# Altium PCB Tunng_PCB2.PcbDoc
Units mm, origin at the board's own origin, x right, y up, seen from the top; angles counter-clockwise.
Board outline 95.38 x 64.77 mm, 2 copper layers (Top Layer, Bottom Layer); 34 components, 13 nets, 174 pads, 0 vias.
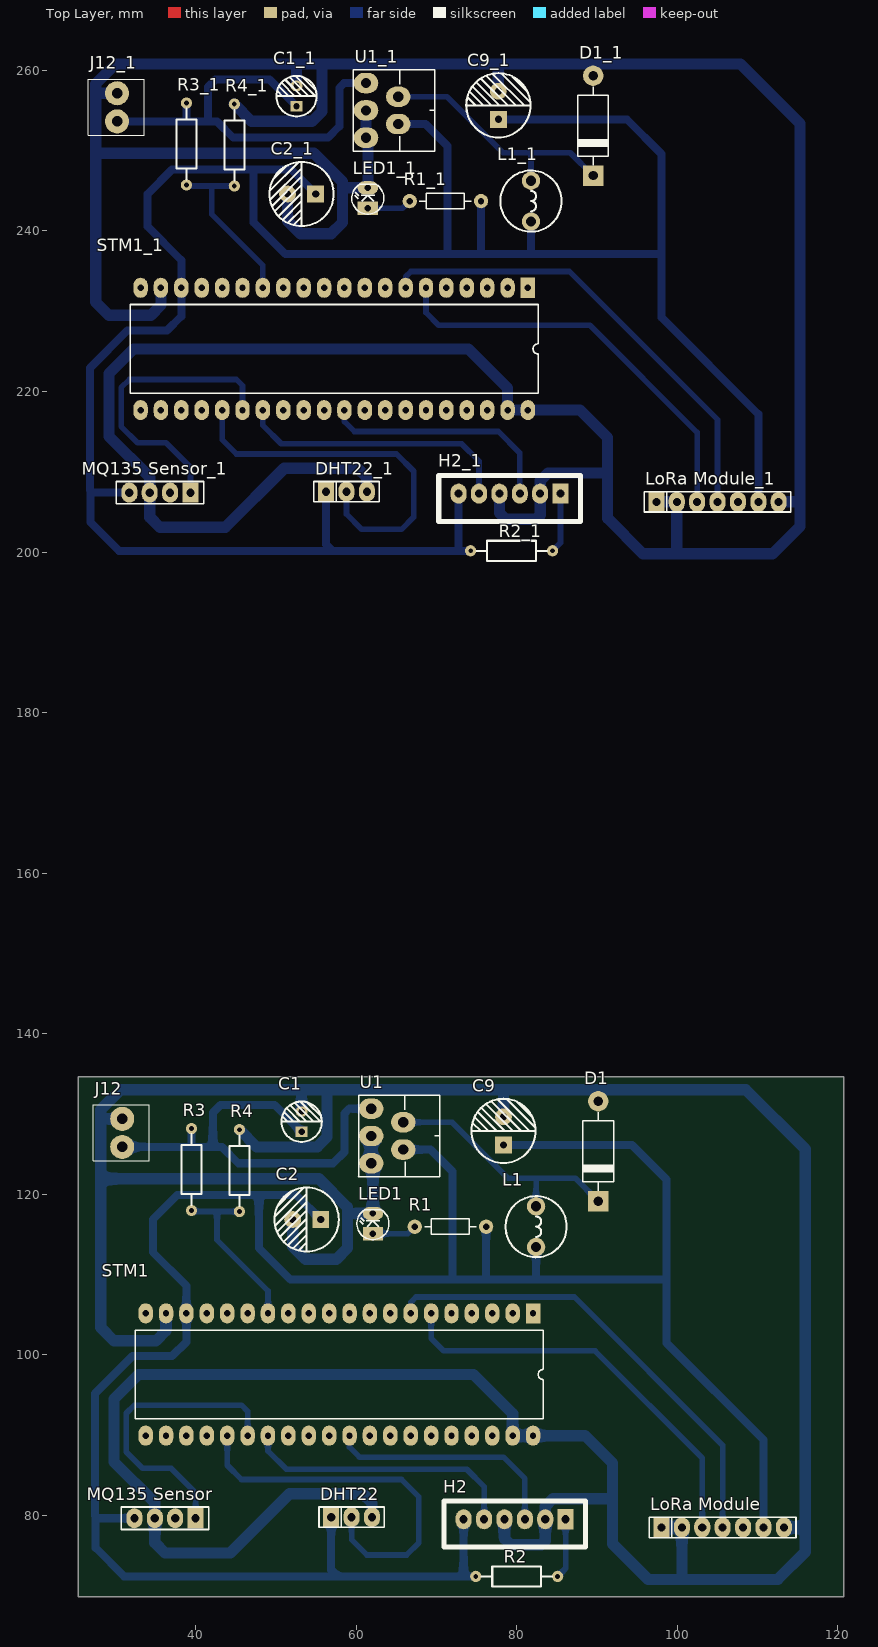
[diagram p0: Top Layer view]
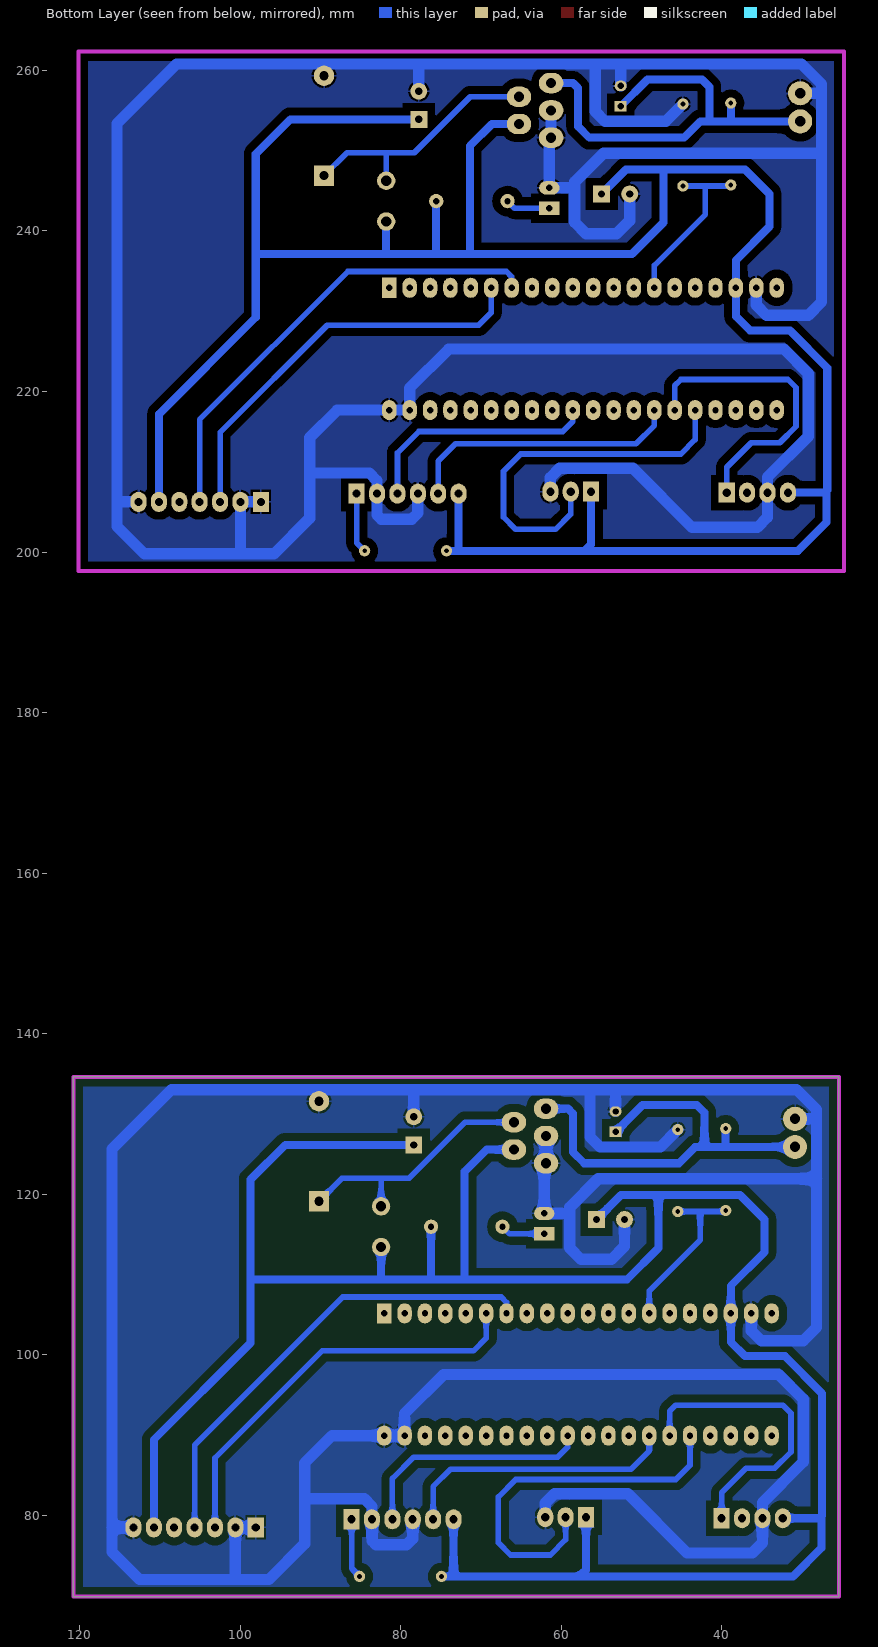
[diagram p1: Bottom Layer view, seen from below]

## Layer stack, top to bottom
Top Solder: solder mask 0.0102, Solder Resist, Dk 3.5
Top Layer: signal copper 0.0356
Dielectric 1: dielectric 0.32, FR-4, Dk 4.8
Bottom Layer: signal copper 0.0356
Bottom Solder: solder mask 0.0102, Solder Resist, Dk 3.5

## Board outline
25.4,69.85 120.777,69.85 120.777,134.62 25.4,134.62

## Design rules (kind name [scope] priority, off if disabled: settings)
Clearance [All] p1: gap=1 ignorepadtopadclearanceinfootprint=FALSE
PolygonConnect [All] p1: connectstyle=Relief reliefconductorwidth=0.254 reliefentries=4 polygonreliefangle="90 Angle" airgapwidth=0.254
RoutingLayers [All] p1: top layer_v5=FALSE bottom layer_v5=TRUE
RoutingVias [All] p1: holewidth=0.711 width=1.27 viastyle="Through Hole" minholewidth=0.711 minwidth=1.27 maxholewidth=0.711 maxwidth=1.27
SolderMaskExpansion [All] p1: expansion=0.102
Width gnd [InNet('GND')] p1: maxlimit=1.4 minlimit=1.4 preferedwidth=1.4
Width 5v [InNet('5V')] p2: maxlimit=1 minlimit=1 preferedwidth=1
Width net [InNetClass('All Nets')] p3: maxlimit=0.7 minlimit=0.7 preferedwidth=0.7
29 further rules are at their usual default settings.

## Classes and differential pairs
component class Tunng_Sheet2: C1 C2 C9 D1 DHT22 H2 J12 L1 LED1 "LoRa Module" "MQ135 Sensor" R1 R2 R3 R4 STM1 U1

## Components (designator, comment, footprint, x,y, rotation, side; value= is the part's Value field where it differs from the comment)
C1 "100uF" "tu hoa 5mm" 53.213,129.032 r90 top
C1_1 "100uF" "tu hoa 5mm" 52.578,256.794 r90 top (schematic designator C1)
C2 "1000uF" "tu hoa 8mm" 53.848,116.84 r180 top
C2_1 "1000uF" "tu hoa 8mm" 53.213,244.602 r180 top (schematic designator C2)
C9 "220uF" "Tu hoa 8mm" 78.359,127.889 r90 top
C9_1 "220uF" "Tu hoa 8mm" 77.724,255.651 r90 top (schematic designator C9)
D1 "1N5822" DIO-3A 90.17,118.491 r90 top value=1N5007
D1_1 "1N5822" DIO-3A 89.535,246.253 r90 top value=1N5007 (schematic designator D1)
DHT22 "DHT22" "JP 1x3 CT" 56.896,79.756 r0 top
DHT22_1 "DHT22" "JP 1x3 CT" 56.261,207.518 r0 top (schematic designator DHT22)
H2 "PM 2.5 Sensor" XH2.54M-6 86.106,79.502 r180 top
H2_1 "PM 2.5 Sensor" XH2.54M-6 85.471,207.264 r180 top (schematic designator H2)
J12 "KF2" KF2-3.5 30.861,127.635 r270 top
J12_1 "KF2" KF2-3.5 30.226,255.397 r270 top (schematic designator J12)
L1 "100uH 3A" "CUON CAM 100uH3A" 82.423,115.951 r270 top
L1_1 "100uH 3A" "CUON CAM 100uH3A" 81.788,243.713 r270 top (schematic designator L1)
LED1 "LED" LED-3 62.103,115.062 r90 top value="LED 3 ly Single Colour"
LED1_1 "LED" LED-3 61.468,242.824 r90 top value="LED 3 ly Single Colour" (schematic designator LED1)
"LoRa Module" "LoRa Module" "JP 1x7 CT" 98.044,78.486 r0 top
"LoRa Module_1" "LoRa Module" "JP 1x7 CT" 97.409,206.248 r0 top (schematic designator "LoRa Module")
"MQ135 Sensor" "MQ135 Sensor" MQ2-MODULE 36.195,79.629 r180 top
"MQ135 Sensor_1" "MQ135 Sensor" MQ2-MODULE 35.56,207.391 r180 top (schematic designator "MQ135 Sensor")
R1 "Res1" R1/4W 76.2,115.951 r180 top value=330R
R1_1 "Res1" R1/4W 75.565,243.713 r180 top value=330R (schematic designator R1)
R2 "150R" "tro vach 1/4w" 80.01,72.39 r0 top
R2_1 "150R" "tro vach 1/4w" 79.375,200.152 r0 top (schematic designator R2)
R3 "5K" "tro vach 1/4w" 39.497,123.063 r90 top
R3_1 "5K" "tro vach 1/4w" 38.862,250.825 r90 top (schematic designator R3)
R4 "7K" "tro vach 1/4w" 45.466,122.936 r270 top
R4_1 "7K" "tro vach 1/4w" 44.831,250.698 r270 top (schematic designator R4)
STM1 "KIT STM32F103C8T6" "STM32F103 KIT" 82.042,105.156 r270 top
STM1_1 "KIT STM32F103C8T6" "STM32F103 KIT" 81.407,232.918 r270 top (schematic designator STM1)
U1 "LM2576" DIP5 63.881,127.254 r270 top
U1_1 "LM2576" DIP5 63.246,255.016 r270 top (schematic designator U1)

## Footprints (in the part's own frame and the unit in brackets; to place one, negate y for a bottom-side part, rotate by r counter-clockwise, add the part's x,y. Pads: shape width x height; smd on the part's side, far side on the other; paste and mask are expansions set on the pad)
"CUON CAM 100uH3A" [mil] "100uH3A"
  round 90 hole 50: 1(-100,0) 2(100,0)
  silkscreen extent -150,-150 150,150, body extent -171,-175 171,167, height 394
DIO-3A [mil] "Diode 3A"
  round 100 hole 45: 1(515,0)
  rect 100x100 hole 45: 2(25,0)
  silkscreen extent 76,-75 461,75, body extent 4,-72 536,70, height 142
DIP5 [mm]
  oval 2.54x3.048 hole 1.27: 1(-3.4,-2) 2(-1.7,2) 3(0,-2) 4(1.7,2) 5(3.4,-2)
  silkscreen extent -5.08,-3.61 5.08,6.53, body extent -4.99,-2.25 5.21,6.31, height 18.81
"JP 1x3 CT" [mm]
  rect 2x2.5 hole 1.02: 1(0,0)
  oval 2x2.5 hole 1.02: 2(2.54,0) 3(5.08,0)
  silkscreen extent -1.52,-1.27 6.6,1.27, body extent -1.52,-1.25 6.6,1.25, height 8.51
"JP 1x7 CT" [mm] "7 row, straight, gold plating"
  rect 2x2.5 hole 1: 1(0,0)
  oval 2x2.5 hole 1: 2(2.54,0) 3(5.08,0) 4(7.62,0) 5(10.16,0) 6(12.7,0) 7(15.24,0)
  silkscreen extent -1.52,-1.27 16.76,1.27, body extent -1.52,-1.25 16.76,1.25, height 8.51
KF2-3.5 [mm] "3,50mm - modular - blue - Horizontal wire entry - Pressure clamp - 8,4mm height - 02p"
  round 3 hole 1.3: 1(-1.75,0) 2(1.75,0)
  silkscreen extent -3.5,-3.6 3.5,3.4, body extent -3.95,-3.6 4.05,3.4, height 8.41
LED-3 [mil] "LED 2 PIN, 3ly Only colour"
  rect 65x100 hole 32: 1(0,0)
  oval 65x100 hole 32: 2(100,0)
  silkscreen extent -29,-78 118,79, body extent -25,-75 113,75, height 217
MQ2-MODULE [mm]
  rect 2x2.5 hole 1.02: 1(-3.81,0)
  oval 2x2.5 hole 1.02: 2(-1.27,0) 3(1.27,0) 4(3.81,0)
  silkscreen extent -5.46,-1.4 5.46,1.4, body extent -10,-1.25 10,21.46, height 38
R1/4W [mil] "R 1/4W, 2 Pin, 350mil"
  round 70 hole 31: 1(0,0) 2(350,0)
  silkscreen extent 48,-38 302,38, body extent -40,-47 386,47, height 111
"STM32F103 KIT" [mm]
  rect 2.5x1.8 hole 0.8: 1(0,0)
  oval 2.5x1.8 hole 0.8: 2(0,-2.54) 3(0,-5.08) 4(0,-7.62) 5(0,-10.16) 6(0,-12.7) 7(0,-15.24) 8(0,-17.78) 9(0,-20.32) 10(0,-22.86) 11(0,-25.4) 12(0,-27.94) 13(0,-30.48) 14(0,-33.02) 15(0,-35.56) 16(0,-38.1) 17(0,-40.64) 18(0,-43.18) 19(0,-45.72) 20(0,-48.26) 21(15.24,-48.26) 22(15.24,-45.72) 23(15.24,-43.18) 24(15.24,-40.64) 25(15.24,-38.1) 26(15.24,-35.56) 27(15.24,-33.02) 28(15.24,-30.48) 29(15.24,-27.94) 30(15.24,-25.4) 31(15.24,-22.86) 32(15.24,-20.32) 33(15.24,-17.78) 34(15.24,-15.24) 35(15.24,-12.7) 36(15.24,-10.16) 37(15.24,-7.62) 38(15.24,-5.08) 39(15.24,-2.54) 40(15.24,0)
  silkscreen extent 2.08,-49.53 13.16,1.27, body extent -3.81,-53.97 19.05,3.59, height 16.12
"tro vach 1/4w" [mm]
  round 1.4 hole 0.6: 1(-5.1,0) 2(5.1,0)
  silkscreen extent -4.39,-1.25 4.42,1.25, body extent -5.38,-1.2 5.38,1.2, height 2.41
"tu hoa 5mm" [mm]
  rect 1.3x1.5 hole 0.8: 1(-1.27,0)
  oval 1.3x1.5 hole 0.8: 2(1.27,0)
  silkscreen extent -2.51,-2.51 2.51,2.51, body extent -3.12,-3.18 3.23,3.18, height 14.55
"tu hoa 8mm" [mm]
  rect 2.1x2.1 hole 0.9: 1(-1.75,0)
  round 2.1 hole 0.9: 2(1.75,0)
  silkscreen extent -4,-4 4,4, body extent -4.1,-4.07 4.1,4.13, height 13.81
"Tu hoa 8mm" [mm]
  rect 2.1x2.1 hole 0.9: 1(-1.75,0)
  round 2.1 hole 0.9: 2(1.75,0)
  silkscreen extent -4,-4 4,4, body extent -4.1,-4.07 4.1,4.13, height 13.81
XH2.54M-6 [mm]
  rect 2x2.5 hole 1: 1(0,0)
  oval 2x2.5 hole 1: 2(2.54,0) 3(5.08,0) 4(7.62,0) 5(10.16,0) 6(12.7,0)
  silkscreen extent -2.48,-2.26 15.18,3.46, body extent -2.48,-2.26 15.18,3.48, height 6.91

## Part data
C1 C1_1: library part "Tu Hoa 100uF 25V 6x11", "C?m", Chung_Loai=C?m, Don_Vi=Con, Ma_Hang=MH001351, So_Chan=2, Ten_Linh_Kien="T? Hóa 100uF 25V 6x11MM"
C2 C2_1: library part "Tu Hoa 1000uF 16V 8x20", "C?m", Chung_Loai=C?m, Don_Vi=Con, Ma_Hang=MH008300, So_Chan=2, Ten_Linh_Kien="T? Hóa 1000uF 16V 8x20MM"
C9 C9_1: library part "Tu Hoa 220uF 25V 8x10", "C?m", Chung_Loai=C?m, Don_Vi=Con, Ma_Hang=MH006864, So_Chan=2, Ten_Linh_Kien="T? Hóa 220uF 25V 8x10MM"
D1 D1_1: library part Diode, "Default Diode", Code - JEDEC=DO-214-AB, Published=8-Jun-2000, Publisher="Altium Limited", Revision="July-2002: Re-released for DXP Platform."
DHT22 DHT22_1: library part "JP 1x3 2.54 Cai Thang", "C?m", Chung_Loai=C?m, Don_Vi=Con, Ma_Hang=MH004006, Ten_Linh_Kien="Jump Ðon Cái 2.54MM 1x20P Th?ng"
H2 H2_1: library part "Header 6P 2.54 Duc Thang", "C?m", Chung_Loai=C?m, Don_Vi=Con, Ma_Hang=MH001972, Ten_Linh_Kien="Header 6P XH2.54-6P Ð?c Th?ng"
J12 J12_1: Manufacturer="Würth Elektronik eiSos GmbH", partNo=691103110002, ComponentLink1 Description=Manufacturer, ComponentLink1URL=http://www.we-online.com, ComponentLink2 Description=Datasheet, ComponentLink2URL=http://katalog.we-online.de/em/datasheet/6911031100xx.pdf, Created by="Karrer Zheng", Created Date="29 October 2013", NoPins=2
L1 L1_1: library part "CUON CAM 100uH DIP", "Dán", Chung_Loai=Dán, Don_Vi=Con, Ma_Hang=MH002209, Ten_Linh_Kien="Cu?n C?m 100uH 3A 8x10MM"
LED1 LED1_1: "LED Single colour Green and Red"
"LoRa Module" "LoRa Module_1": library part "JP 1x7 2.54 Cai Thang", "C?m", Chung_Loai=C?m, Don_Vi=Con, Ma_Hang=MH004006, Ten_Linh_Kien="Jump Ðon Cái 2.54MM 1x20P Th?ng"
"MQ135 Sensor" "MQ135 Sensor_1": library part MQ2-MOD, Manufacturer="W¨¹rth Elektronik eiSos GmbH", partNo=613004143121, ComponentLink1 Description=Manufacturer, ComponentLink1URL=http://www.we-online.com, ComponentLink2 Description=Datasheet, ComponentLink2URL=http://katalog.we-online.de/em/datasheet/6130xx143121.pdf, Created by="Karrer Zheng", Created Date="29 March 2013", NoPins=04
R1 R1_1: library part Res1_1, "Resistor", Manufacturer="Generic Components", Class=Passive, Published=08/06/2000, Publisher="Altium Hobart Technology Centre", SubClass=Resistor
R2 R2_1 R3 R3_1 R4 R4_1: library part "Tro Vach 1/4W 5% 510R", "C?m", Chung_Loai=C?m, Don_Vi=Con, Ma_Hang=MH007325, So_Chan=2, Ten_Linh_Kien="Tr? V?ch 1/4w 5% 510R"
STM1 STM1_1: library part "STM32f103 Bluepill", "KIT STM32F103C8T6 Bluepill"
U1 U1_1: Max Input Voltage="12 V", Max Output Current="3 (6.0 peak) A", Max Output Voltage=mV, Temperature Range="-40 to +125 degC", Category=IC-Power, Min Input Voltage=mV, Min Output Voltage=mV, Mounting Technology="Surface Mount", Status=Unreleased, Supply Voltage=mV

## Nets (pads, with @x,y where several pads share a name; then routed paths per layer and width w, separated by ;. In a path a pad name is that pad's centre, name@x,y a point inside that pad or via, vN(x,y) a via of type N, cw(c..) or ccw(c..) an arc to the next point about the centre after c; other vN are vias at no path point)
5V: "LoRa Module.6" "MQ135 Sensor.4" C2.1 C9.1 DHT22.1 H2.6 L1.2 R1.1 R2.1 STM1.18 U1.4 | length 303.3
  Bottom Layer w1: 32.385,79.629 27.813,79.629 27.559,79.883 ; C2.1 52.55,119.888 47.879,119.888 ; DHT22.1 56.896,73.203 57.709,72.39 ; U1.4 69.264,125.554 72.009,122.809 72.009,109.474 72.136,109.347 ; H2.6 73.406,72.39 ; R2.1 73.406,72.39 ; R1.1 76.2,109.474 76.327,109.347 ; C9.1 94.361,126.139 98.679,121.821 98.679,109.347 ; L1.2 82.423,109.474 82.296,109.347 ; 110.744,78.486 110.744,89.408 98.679,101.473 98.679,109.347 ; 27.559,79.883 27.483,79.959 27.483,95.174 32.131,99.822 37.084,99.822 38.862,101.6 STM1.18 38.862,108.585 34.671,112.776 34.671,116.84 37.719,119.888 47.879,119.888 ; 27.559,79.883 27.559,75.946 31.115,72.39 57.709,72.39 ; 47.879,119.888 47.879,113.284 51.816,109.347 72.136,109.347 ; 57.709,72.39 73.406,72.39 ; 72.136,109.347 76.327,109.347 ; 76.327,109.347 82.296,109.347 ; 82.296,109.347 98.679,109.347
+12V: C1.1 J12.2 R3.2 U1.1 | length 56.9
  Bottom Layer w0.7: 39.497,126.012 39.624,125.885
  Bottom Layer w1: J12.2 39.624,125.885 42.164,125.885 ; 39.497,126.012 R3.2 ; C1.1 49.86,131.115 43.104,131.115 42.164,130.175 42.164,125.885 ; U1.1 59.153,130.654 58.547,130.048 58.547,125.273 57.128,123.854 45.33,123.854 43.299,125.885 42.164,125.885
A0: DHT22.2 STM1.25 | length 47.5
  Bottom Layer w0.7: STM1.25 43.942,86.233 45.72,84.455 65.659,84.455 67.818,82.296 67.818,76.581 66.294,75.057 61.341,75.057 59.436,76.962 DHT22.2
A1: "MQ135 Sensor.1" STM1.26 | length 37.6
  Bottom Layer w0.7: 40.005,79.629 40.005,82.804 36.957,85.852 33.401,85.852 31.369,87.884 31.369,92.71 32.385,93.726 45.72,93.726 46.482,92.964 STM1.26
A2: H2.5 STM1.27 | length 34.7
  Bottom Layer w0.7: STM1.27 49.022,88.011 51.308,85.725 73.787,85.725 75.946,83.566 H2.5
A6: H2.3 STM1.31 | length 30
  Bottom Layer w0.7: STM1.31 59.182,88.494 60.427,87.249 78.359,87.249 81.026,84.582 H2.3
ADC: R3.1 R4.2 STM1.14 | length 21.3
  Bottom Layer w0.7: R3.1 39.624,117.836 42.672,117.836 ; R4.2 42.672,117.836 ; STM1.14 49.022,107.95 42.672,114.3 42.672,117.836
GND: "LoRa Module.1" "LoRa Module.2" "LoRa Module.7" "MQ135 Sensor.3" C1.2 C2.2 C9.2 D1.1 DHT22.3 H2.2 H2.4 J12.1 LED1.2 R4.1 STM1.19 STM1.39 STM1.40 U1.3 U1.5 | length 463.4
  Bottom Layer w1.4: J12.1 28.222,129.385 28.194,129.413 ; STM1.19 36.322,102.997 35.052,101.727 29.845,101.727 28.194,103.378 28.194,121.92 ; R4.1 47.614,125.888 55.149,125.888 56.388,127.127 56.388,132.897 56.261,133.024 ; C2.2 52.098,113.51 53.721,111.887 57.531,111.887 58.928,113.284 58.928,117.602 ; C1.2 53.213,132.897 53.086,133.024 ; U1.3 U1.5 62.103,123.854 LED1.2 58.928,117.602 ; DHT22.3 61.976,81.534 60.833,82.677 51.689,82.677 44.323,75.311 36.195,75.311 34.925,76.581 34.925,79.629 34.925,81.559 29.845,86.639 29.845,94.488 32.893,97.536 74.625,97.536 79.502,92.659 STM1.39 STM1.40 88.519,89.916 91.948,86.487 91.948,76.454 96.393,72.009 100.711,72.009 ; C9.2 78.359,132.897 78.486,133.024 ; H2.4 78.486,77.089 79.248,76.327 83.058,76.327 83.566,76.835 H2.2 83.566,81.102 84.531,82.067 91.694,82.067 ; D1.1 89.952,131.79 89.952,132.988 89.916,133.024 ; 98.044,78.486 100.584,78.486 100.584,72.136 100.711,72.009 ; 113.284,78.486 115.951,78.486 ; 28.194,121.92 55.372,121.92 58.928,118.364 58.928,117.602 ; 28.194,121.92 28.194,129.413 ; 28.194,129.413 28.194,130.531 30.687,133.024 53.086,133.024 ; 53.086,133.024 56.261,133.024 ; 56.261,133.024 78.486,133.024 ; 78.486,133.024 89.916,133.024 ; 89.916,133.024 108.53,133.024 115.951,125.603 115.951,78.486 ; 100.711,72.009 112.522,72.009 115.951,75.438 115.951,78.486
NetD1_2: D1.2 L1.1 U1.2 | length 31.9
  Bottom Layer w0.7: U1.2 71.96,128.954 78.93,121.983 82.296,121.983 ; L1.1 82.423,121.856 82.296,121.983 ; D1.2 87.312,121.983 82.296,121.983
NetH2_1: H2.1 R2.2 | length 7.5
  Bottom Layer w0.7: R2.2 86.106,73.386 H2.1
NetLED1_1: LED1.1 R1.2 | length 5.6
  Bottom Layer w0.7: LED1.1 66.421,115.062 R1.2
Rx: "LoRa Module.4" STM1.7 | length 58.4
  Bottom Layer w0.7: STM1.7 66.802,106.528 67.462,107.188 87.198,107.188 105.664,88.722 105.664,78.486
Tx: "LoRa Module.3" STM1.6 | length 51.7
  Bottom Layer w0.7: STM1.6 69.342,102.057 70.917,100.482 89.778,100.482 103.124,87.136 103.124,78.486
pads on no net: "LoRa Module.5" "LoRa Module_1.1" "LoRa Module_1.2" "LoRa Module_1.3" "LoRa Module_1.4" "LoRa Module_1.5" "LoRa Module_1.6" "LoRa Module_1.7" "MQ135 Sensor.2" "MQ135 Sensor_1.1" "MQ135 Sensor_1.2" "MQ135 Sensor_1.3" "MQ135 Sensor_1.4" C1_1.1 C1_1.2 C2_1.1 C2_1.2 C9_1.1 C9_1.2 D1_1.1 D1_1.2 DHT22_1.1 DHT22_1.2 DHT22_1.3 H2_1.1 H2_1.2 H2_1.3 H2_1.4 H2_1.5 H2_1.6 J12_1.1 J12_1.2 L1_1.1 L1_1.2 LED1_1.1 LED1_1.2 R1_1.1 R1_1.2 R2_1.1 R2_1.2 R3_1.1 R3_1.2 R4_1.1 R4_1.2 STM1.1 STM1.2 STM1.3 STM1.4 STM1.5 STM1.8 STM1.9 STM1.10 STM1.11 STM1.12 STM1.13 STM1.15 STM1.16 STM1.17 STM1.20 STM1.21 STM1.22 STM1.23 STM1.24 STM1.28 STM1.29 STM1.30 STM1.32 STM1.33 STM1.34 STM1.35 STM1.36 STM1.37 STM1.38 STM1_1.1 STM1_1.2 STM1_1.3 STM1_1.4 STM1_1.5 STM1_1.6 STM1_1.7 STM1_1.8 STM1_1.9 STM1_1.10 STM1_1.11 STM1_1.12 STM1_1.13 STM1_1.14 STM1_1.15 STM1_1.16 STM1_1.17 STM1_1.18 STM1_1.19 STM1_1.20 STM1_1.21 STM1_1.22 STM1_1.23 STM1_1.24 STM1_1.25 STM1_1.26 STM1_1.27 STM1_1.28 STM1_1.29 STM1_1.30 STM1_1.31 STM1_1.32 STM1_1.33 STM1_1.34 STM1_1.35 STM1_1.36 STM1_1.37 STM1_1.38 STM1_1.39 STM1_1.40 U1_1.1 U1_1.2 U1_1.3 U1_1.4 U1_1.5
copper on no net: | length 1150
  Bottom Layer w0.7: 38.862,245.725 38.989,245.598 42.037,245.598 ; 38.862,253.774 38.989,253.647 ; 39.37,207.391 39.37,210.566 36.322,213.614 32.766,213.614 30.734,215.646 30.734,220.472 31.75,221.488 45.085,221.488 45.847,220.726 45.847,217.678 ; 43.307,217.678 43.307,213.995 45.085,212.217 65.024,212.217 67.183,210.058 67.183,204.343 65.659,202.819 60.706,202.819 58.801,204.724 58.801,207.518 ; 44.831,245.598 42.037,245.598 ; 48.387,217.678 48.387,215.773 50.673,213.487 73.152,213.487 75.311,211.328 75.311,207.264 ; 48.387,232.918 48.387,235.712 42.037,242.062 42.037,245.598 ; 58.547,217.678 58.547,216.256 59.792,215.011 77.724,215.011 80.391,212.344 80.391,207.264 ; 61.468,242.824 65.786,242.824 66.675,243.713 ; 65.246,256.716 71.325,256.716 78.295,249.745 81.661,249.745 ; 66.167,232.918 66.167,234.29 66.827,234.95 86.563,234.95 105.029,216.484 105.029,206.248 ; 68.707,232.918 68.707,229.819 70.282,228.244 89.143,228.244 102.489,214.898 102.489,206.248 ; 81.788,246.253 81.788,249.618 81.661,249.745 ; 84.475,200.152 85.471,201.148 85.471,207.264 ; 89.535,246.888 86.677,249.745 81.661,249.745
  Bottom Layer w1: 30.226,253.647 38.989,253.647 41.529,253.647 ; 31.75,207.391 27.178,207.391 26.924,207.645 ; 38.862,253.774 38.862,255.925 ; 52.578,255.524 49.225,258.877 42.469,258.877 41.529,257.937 41.529,253.647 ; 54.963,244.602 51.915,247.65 47.244,247.65 ; 56.261,207.518 56.261,200.965 57.074,200.152 ; 61.246,258.416 58.518,258.416 57.912,257.81 57.912,253.035 56.493,251.616 44.695,251.616 42.664,253.647 41.529,253.647 ; 65.246,253.316 68.629,253.316 71.374,250.571 71.374,237.236 71.501,237.109 ; 72.771,207.264 72.771,200.152 ; 74.275,200.152 72.771,200.152 ; 75.565,243.713 75.565,237.236 75.692,237.109 ; 77.724,253.901 93.726,253.901 98.044,249.583 98.044,237.109 ; 81.788,241.173 81.788,237.236 81.661,237.109 ; 110.109,206.248 110.109,217.17 98.044,229.235 98.044,237.109 ; 26.924,207.645 26.924,203.708 30.48,200.152 57.074,200.152 ; 26.924,207.645 26.848,207.721 26.848,222.936 31.496,227.584 36.449,227.584 38.227,229.362 38.227,232.918 38.227,236.347 34.036,240.538 34.036,244.602 37.084,247.65 47.244,247.65 ; 47.244,247.65 47.244,241.046 51.181,237.109 71.501,237.109 ; 57.074,200.152 72.771,200.152 ; 71.501,237.109 75.692,237.109 ; 75.692,237.109 81.661,237.109 ; 81.661,237.109 98.044,237.109
  Bottom Layer w1.4: 30.226,257.147 27.587,257.147 27.559,257.175 ; 35.687,232.918 35.687,230.759 34.417,229.489 29.21,229.489 27.559,231.14 27.559,249.682 ; 44.831,255.798 46.979,253.65 54.514,253.65 55.753,254.889 55.753,260.659 55.626,260.786 ; 51.463,244.602 51.463,241.272 53.086,239.649 56.896,239.649 58.293,241.046 58.293,245.364 ; 52.578,258.064 52.578,260.659 52.451,260.786 ; 61.246,255.016 61.246,251.616 61.468,251.616 61.468,245.364 58.293,245.364 ; 61.341,207.518 61.341,209.296 60.198,210.439 51.054,210.439 43.688,203.073 35.56,203.073 34.29,204.343 34.29,207.391 34.29,209.321 29.21,214.401 29.21,222.25 32.258,225.298 73.99,225.298 78.867,220.421 78.867,217.678 81.407,217.678 87.884,217.678 91.313,214.249 91.313,204.216 95.758,199.771 100.076,199.771 ; 77.724,257.401 77.724,260.659 77.851,260.786 ; 77.851,207.264 77.851,204.851 78.613,204.089 82.423,204.089 82.931,204.597 82.931,207.264 82.931,208.864 83.896,209.829 91.059,209.829 ; 89.535,259.334 89.317,259.552 89.317,260.75 89.281,260.786 ; 97.409,206.248 99.949,206.248 99.949,199.898 100.076,199.771 ; 112.649,206.248 115.316,206.248 ; 27.559,249.682 27.559,257.175 ; 27.559,249.682 54.737,249.682 58.293,246.126 58.293,245.364 ; 27.559,257.175 27.559,258.293 30.052,260.786 52.451,260.786 ; 52.451,260.786 55.626,260.786 ; 55.626,260.786 77.851,260.786 ; 77.851,260.786 89.281,260.786 ; 89.281,260.786 107.895,260.786 115.316,253.365 115.316,206.248 ; 100.076,199.771 111.887,199.771 115.316,203.2 115.316,206.248

## Polygon pours and split planes (outlines as drawn)
no net on Bottom Layer "Top Layer-No Net" (solid, remove dead copper, pour order 6): 24.765,262.382 120.142,262.382 120.142,197.612 120.015,197.739 24.765,197.739
GND on Bottom Layer "Top Layer-No Net" (solid, remove dead copper, pour order 4): 25.4,134.62 120.777,134.62 120.777,69.85 120.65,69.977 25.4,69.977

## Keep-outs
Bottom Layer:
  lines w0.5: 24.765,197.612 113.03,197.612 120.142,197.612 120.142,262.382 24.765,262.382 24.765,197.612 ; 25.4,69.85 25.4,134.62 120.777,134.62 120.777,69.85 113.665,69.85 25.4,69.85